# EAGLE board front_board (EAGLE 7.1.0)
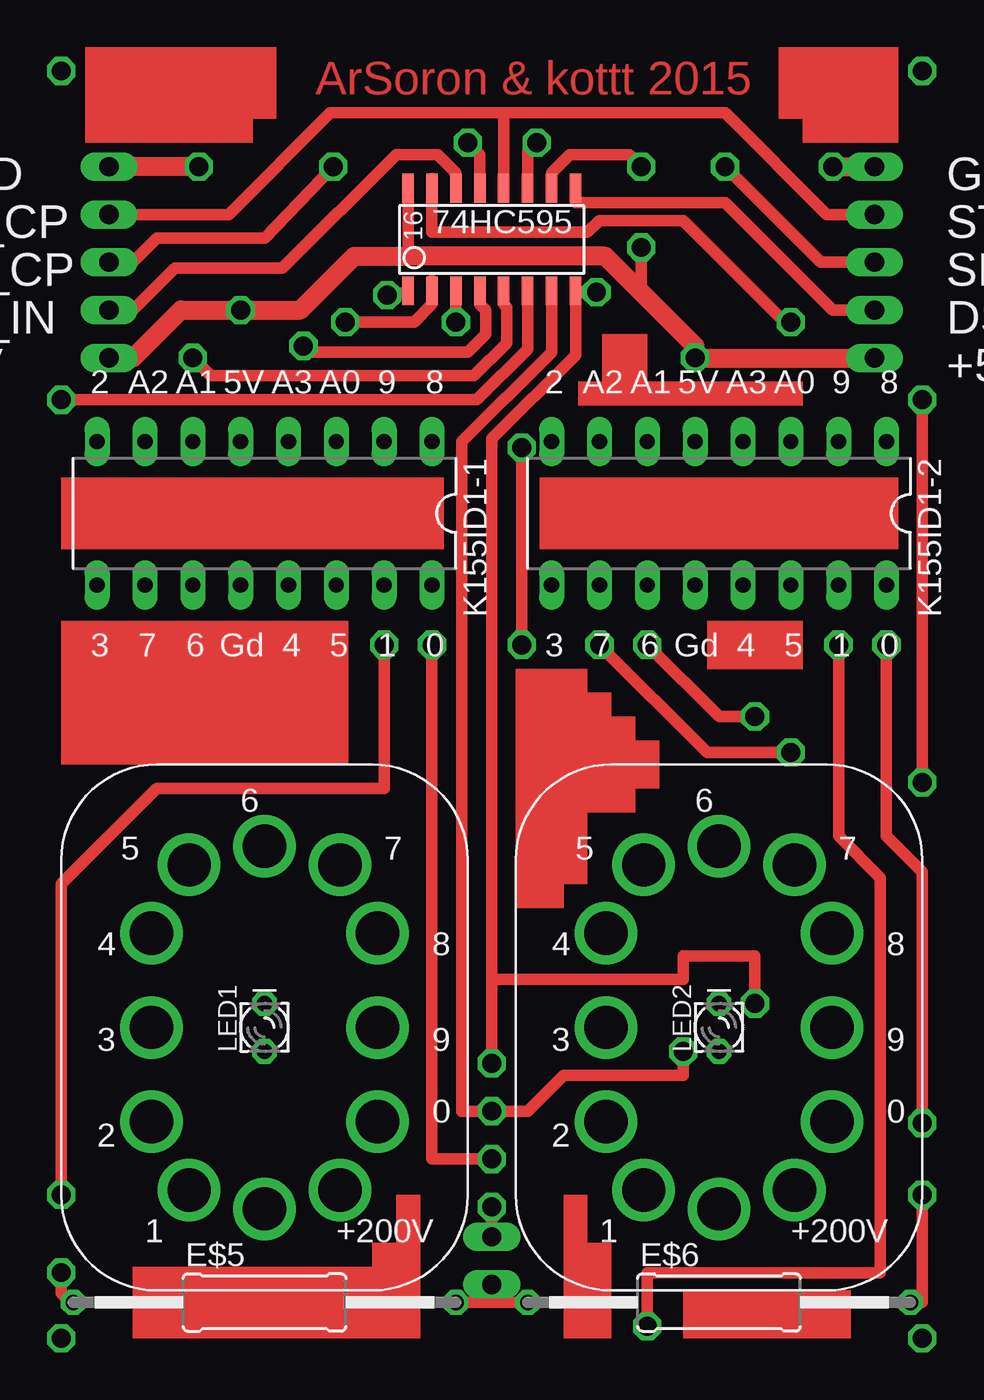
[diagram p0: board, top side]
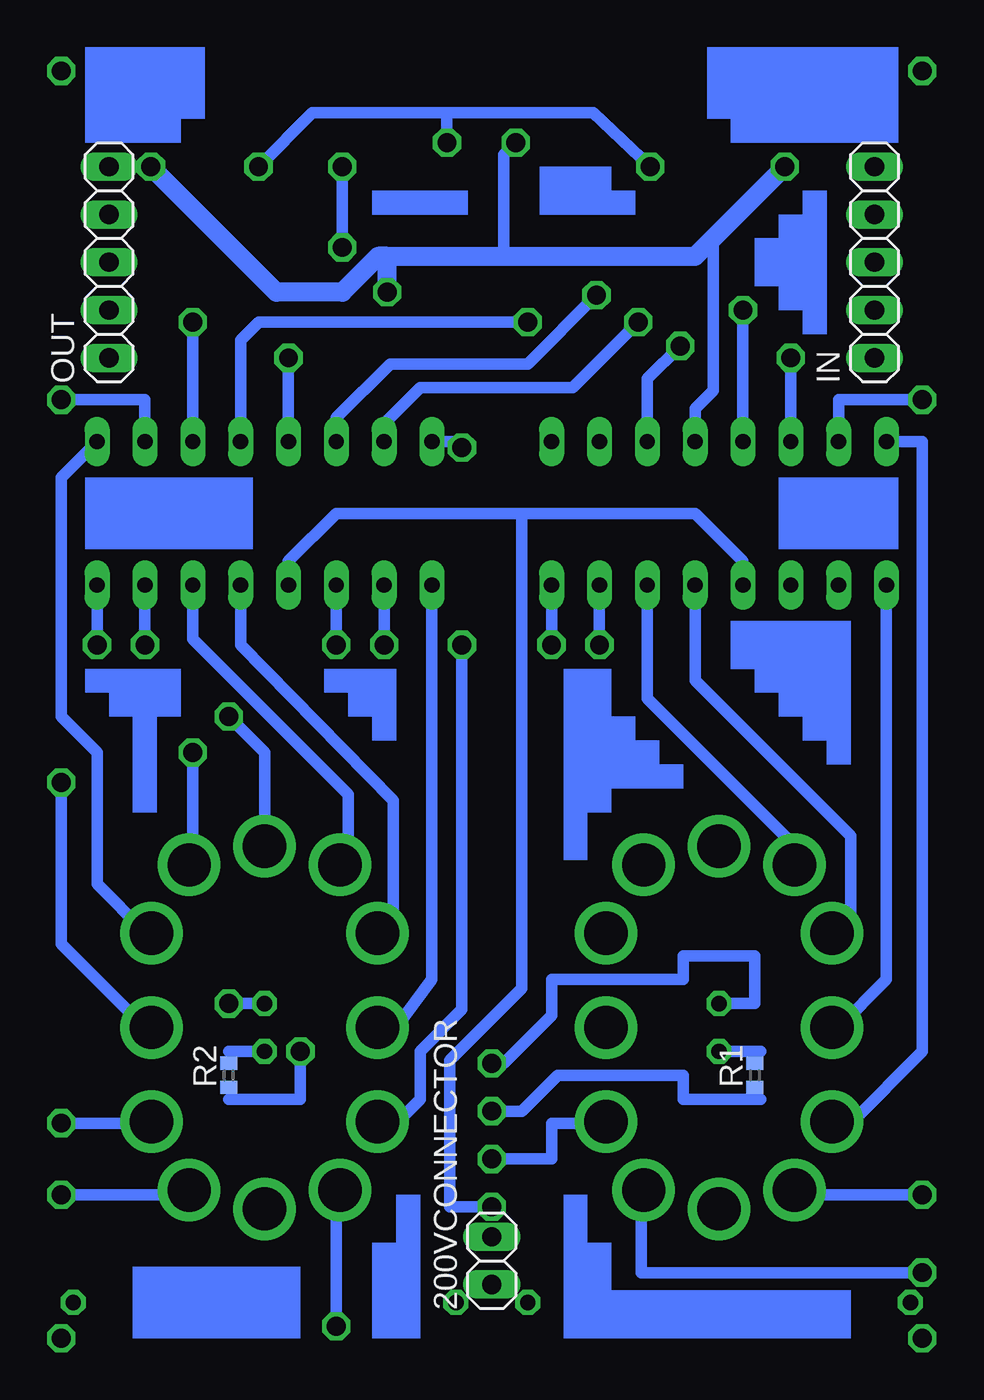
[diagram p1: board, bottom side, seen from below]

No outline drawn. Coordinates in mm, seen from the top.
Copper layers (1*16): Top 0.035mm / dielectric 1.5mm / Bottom 0.035mm
Design rules "default": minimum track width 10mil, minimum drill 24mil, track to track 8mil, track to pad 8mil, pad to pad 8mil, via to via 8mil, smd to smd 8mil, copper to edge 40mil, drill to drill 8mil, minimum pad ring 10mil, minimum via ring 8mil, stop-mask expansion 4mil, vias tented up to drill 0mil, thermal gap 10mil

## Footprints (pad centres in the part's own frame; a part is rotated, then mirrored left to right if it is on the bottom)
SO-16 = smd 0.61 x 1.524: 1 -4.445,-2.794; 2 -3.175,-2.794; 3 -1.905,-2.794; 4 -0.635,-2.794; 5 0.635,-2.794; 6 1.905,-2.794; 7 3.175,-2.794; 8 4.445,-2.794; 9 4.445,2.667; 10 3.175,2.667; 11 1.905,2.667; 12 0.635,2.667; 13 -0.635,2.667; 14 -1.905,2.667; 15 -3.175,2.667; 16 -4.445,2.667
1X02 = drill 1.016 long: 1 -1.27,0; 2 1.27,0
IN-12 = drill 2.3: 0 6,-5; 1 -4,-8.635; 2 -6,-5; 3 -6,0; 4 -6,5; 5 -4,8.635; 6 0,9.635; 7 4,8.635; 8 6,5; 9 6,0; +200V 4,-8.635; P$10 0,-9.635
0309/20 = drill 0.813 octagon: 1 -10.16,0; 2 10.16,0
1X05 = drill 1.016 long: 1 -5.08,0; 2 -2.54,0; 3 0,0; 4 2.54,0; 5 5.08,0
K155ID1 = drill 0.813 long: 1 -8.89,-3.81; 2 -6.35,-3.81; 3 -3.81,-3.81; 4 -1.27,-3.81; 5 1.27,-3.81; 6 3.81,-3.81; 7 6.35,-3.81; 8 8.89,-3.81; 9 8.89,3.81; 10 6.35,3.81; 11 3.81,3.81; 12 1.27,3.81; 13 -1.27,3.81; 14 -3.81,3.81; 15 -6.35,3.81; 16 -8.89,3.81
LED_LD260 = drill 0.813 octagon: A -1.27,0; K 1.27,0
R0402 = smd 0.7 x 0.9: 1 -0.65,0; 2 0.65,0

## Placement (x,y rotation side)
74HC595  [SO-16]  0,29.21 0 top
200VCONNECTOR  [1X02]  0,-25.08 90 bottom
E$1  [IN-12]  -12.06,-12.7 0 top
E$2  [IN-12]  12.06,-12.7 0 top
E$5  [0309/20]  -12.06,-27.3 0 top
E$6  [0309/20]  12.06,-27.3 0 top
IN  [1X05]  -20.32,27.94 90 bottom
K155ID1-1  [K155ID1]  -12.06,14.61 180 top
K155ID1-2  [K155ID1]  12.06,14.61 180 top
LED1  [LED_LD260]  -12.06,-12.7 90 top
LED2  [LED_LD260]  12.06,-12.7 90 top
OUT  [1X05]  20.32,27.94 90 bottom
R1  [R0402]  -13.97,-15.24 90 bottom
R2  [R0402]  13.97,-15.24 90 bottom

## Library data of the parts
74HC595 = texas
200VCONNECTOR IN OUT = pinhead
E$1 E$2 K155ID1-1 K155ID1-2 = _ArSoron
E$5 E$6 = rcl
LED1 LED2 R1 R2 = eagle-ltspice

## Nets
+5V: IN.1 K155ID1-1.5 K155ID1-2.5 OUT.1
+200V: 200VCONNECTOR.1
+200V_LEFT: E$5.1
+200V_RIGHT: E$6.2
DATA_IN: IN.2
DATA_OUT: OUT.2
GND_HIGH: K155ID1-1.12 K155ID1-2.12
GND_LOW: IN.5 K155ID1-1.4 LED1.K LED2.K
S$1: K155ID1-2.1
S$2: K155ID1-2.2
S$3: K155ID1-2.16
S$4: K155ID1-2.9
S$5: K155ID1-2.8
S$6: K155ID1-2.13
S$7: K155ID1-2.14
S$8: K155ID1-2.10
S$9: K155ID1-1.7
S$10: K155ID1-2.11
S$11: LED2.A
S$12: K155ID1-2.15
S$14: K155ID1-1.16
S$15: K155ID1-1.9
S$16: K155ID1-1.8
S$17: K155ID1-1.13
S$18: K155ID1-1.14
S$19: LED1.A
S$20: K155ID1-1.6
S$21: K155ID1-1.3
S$22: K155ID1-1.15
S$23: K155ID1-2.3
S$24: K155ID1-2.4
S$25: K155ID1-2.7
S$26: K155ID1-2.6
SH_CP: IN.3 OUT.3
ST_CP: IN.4 OUT.4

## Tracks (layer width: path | path; a pad name or v marks a point on that pad's centre or on a via)
+5V  (via drill 1)
  Top 0.61: -4.45,28.26 -4.45,32.07 | 3.17,31.43 3.17,32.7 4.13,33.66 7.3,33.66 v7.94,33.02 | v7.94,28.73 7.94,26.35
  Top 1.016: IN.1 -19.05,22.86 -16.51,25.4 v-13.34,25.4 -10.16,25.4 -7.3,28.26 -4.45,28.26 6.03,28.26 7.94,26.35 10.79,23.5 v10.79,22.86 OUT.1
  Bottom 0.61: K155ID1-1.5 v-13.34,25.4 | K155ID1-2.5 v10.79,22.86 | v7.94,33.02 v7.94,28.73
+200V
  Top 0.61: 1.91,-27.3 0,-27.3 | 0,-27.3 -1.91,-27.3 | 0,-27.3 200VCONNECTOR.1
+200V_LEFT  (via drill 1)
  Top 0.61: v-22.86,-25.72 -22.86,-26.67 -22.86,-26.83 -22.38,-27.3 E$5.1
  Bottom 0.61: -7.94,-21.27 -7.94,-25.72 v-22.86,-25.72
+200V_RIGHT  (via drill 1)
  Top 0.61: v22.86,-21.59 22.86,-27.3 E$6.2
  Bottom 0.61: 15.88,-21.59 v22.86,-21.59
DATA_IN
  Top 0.61: -1.91,31.75 -1.91,32.7 -2.86,33.66 -5.08,33.66 -11.11,27.62 -16.83,27.62 -19.05,25.4 IN.2
DATA_OUT
  Top 0.61: 4.45,31.11 12.38,31.11 18.1,25.4 OUT.2
GND_HIGH  (via drill 1)
  Top 0.61: v0,-22.23 0,-23.5
  Bottom 0.61: K155ID1-2.12 10.79,12.06 8.26,14.61 -1.59,14.61 | -1.59,14.61 -1.59,-10.64 2.22,-14.45 2.22,-22.23 v0,-22.23 | K155ID1-1.12 -13.34,12.06 -10.79,14.61 -1.59,14.61
GND_LOW  (via drill 1)
  Top 0.61: v5.56,26.35 4.45,26.35 4.45,23.02 0,18.57 0,-10.16 | v-1.27,34.29 -0.64,33.66 -0.64,31.43 | v13.97,-11.43 13.97,-8.89 10.16,-8.89 10.16,-10.16 0,-10.16 | v0,-14.61 0,-10.16
  Top 1.016: v18.1,33.02 20.32,33.02 | v-15.56,33.02 IN.5
  Bottom 0.61: -0.64,28.26 -0.64,33.66 v-1.27,34.29 | LED2.K v13.97,-11.43 | v0,-14.61 -0.64,-14.61 -3.17,-12.06 -3.17,-10.16 -10.16,-10.16 -10.16,-8.89 -13.97,-8.89 -13.97,-11.43 LED1.K | K155ID1-1.4 -10.79,20.16 -11.75,21.11 -11.75,29.21
  Bottom 1.016: v18.1,33.02 11.43,26.35 7.94,26.35 6.03,28.26 5.56,28.26 | v5.56,26.35 5.56,28.26 | 5.56,28.26 -0.64,28.26 -10.79,28.26 -11.75,29.21 v-15.56,33.02
LED+  (via drill 1)
  Top 0.61: v10.16,-13.97 10.16,-15.24 3.81,-15.24 1.91,-17.14 v0,-17.14 -1.59,-17.14 -1.59,18.41 3.17,23.18 3.17,26.04
  Bottom 0.61: -14.29,-16.51 -10.16,-16.51 -10.16,-15.24 -3.49,-15.24 -1.59,-17.14 v0,-17.14 | v10.16,-13.97 10.16,-16.51 13.97,-16.51
S$1
  Bottom 0.61: 18.41,-7.62 20.95,-5.08 20.95,1.91 22.86,3.81 22.86,16.51 K155ID1-2.1
S$2  (via drill 1)
  Top 0.61: v22.86,0.32 v22.86,20.64
  Bottom 0.61: 18.41,-12.7 22.86,-8.26 v22.86,0.32 | v22.86,20.64 18.41,20.64 K155ID1-2.2
S$3  (via drill 1)
  Top 0.61: v22.86,-17.78 22.86,-4.45 20.95,-2.54 v20.95,7.62
  Bottom 0.61: 18.41,-17.78 v22.86,-17.78 | v20.95,7.62 K155ID1-2.16
S$4
  Bottom 0.61: 5.71,-12.7 5.08,-12.7 3.17,-10.16 K155ID1-2.9
S$5  (via drill 1)
  Top 0.61: v1.59,7.62 v1.59,18.1
  Bottom 0.61: 5.71,-17.78 5.08,-17.78 3.81,-16.51 3.81,-13.97 1.59,-11.75 v1.59,7.62 | v1.59,18.1 1.91,18.41 K155ID1-2.8
S$6
  Bottom 0.61: 5.71,-7.62 5.24,-7.14 5.24,-0.64 13.34,7.62 K155ID1-2.13
S$7
  Bottom 0.61: 8.26,-3.81 7.62,-3.17 7.62,-0.32 15.88,7.94 K155ID1-2.14
S$8  (via drill 1)
  Top 0.61: v15.88,1.91 11.43,1.91 v5.71,7.62
  Bottom 0.61: 15.88,-4.13 v15.88,1.91 | v5.71,7.62 K155ID1-2.10
S$9  (via drill 1)
  Top 0.61: v-22.86,20.64 -0.79,20.64 1.91,23.34 1.91,26.67
  Bottom 0.61: K155ID1-1.7 -18.41,20.64 v-22.86,20.64
S$10  (via drill 1)
  Top 0.61: v13.97,3.81 12.06,3.81 v8.26,7.62
  Bottom 0.61: 12.06,-2.54 12.06,1.91 v13.97,3.81 | v8.26,7.62 K155ID1-2.11
S$11
  Bottom 0.61: LED2.A 13.97,-13.97
S$12  (via drill 1)
  Top 0.61: v8.26,-28.57 8.26,-25.72 20.64,-25.72 20.64,-4.76 18.41,-2.54 v18.41,7.62
  Bottom 0.61: v18.41,7.62 K155ID1-2.15 | 8.26,-21.59 v8.26,-28.57
S$13  (via drill 1)
  other vias: -22.86,38.1
S$14  (via drill 1)
  Top 0.61: v0,-19.68 -3.17,-19.68 v-3.17,7.62
  Bottom 0.61: -5.71,-17.78 -3.17,-17.78 -3.17,-19.68 v0,-19.68 | v-3.17,7.62 K155ID1-1.16
S$15
  Bottom 0.61: -18.41,-12.7 -20.95,-10.16 K155ID1-1.9
S$16
  Bottom 0.61: -18.41,-17.78 -19.05,-17.78 -22.86,-13.97 -22.86,18.41 K155ID1-1.8
S$17
  Bottom 0.61: -18.41,-7.62 -19.05,-6.99 -19.05,-2.54 -10.79,5.71 K155ID1-1.13
S$18
  Bottom 0.61: -15.88,-3.81 -15.88,-2.86 -8.26,4.76 K155ID1-1.14
S$19
  Bottom 0.61: LED1.A -14.29,-13.97
S$20  (via drill 1)
  Top 0.61: v-15.88,22.86 -14.92,21.91 -0.95,21.91 0.79,23.65 0.79,25.56 0.64,25.72 0.64,26.67
  Bottom 0.61: K155ID1-1.6 v-15.88,22.86
S$21  (via drill 1)
  Top 0.61: v-10,23.5 -9.68,23.18 -1.27,23.18 -0.32,24.13 -0.32,25.4 -0.64,25.72 -0.64,26.67
  Bottom 0.61: K155ID1-1.3 -8.26,21.75 v-10,23.5
S$22  (via drill 1)
  Top 0.61: v-22.86,-21.59 -22.86,-5.08 -17.78,0 -5.71,0 v-5.71,7.62
  Bottom 0.61: v-5.71,7.62 K155ID1-1.15 | -16.51,-21.59 v-22.86,-21.59
S$23  (via drill 1)
  Top 0.61: v15.88,24.77 15.56,24.77 10.16,30.16 5.71,30.16 5.08,29.53 -3.17,29.53 -3.17,32.38
  Bottom 0.61: K155ID1-2.3 v15.88,24.77
S$24  (via drill 1)
  Top 0.61: v-1.91,24.77 -1.91,26.35
  Bottom 0.61: K155ID1-2.4 13.34,23.81 12.38,24.77 v-1.91,24.77
S$25  (via drill 1)
  Top 0.61: v-7.78,24.77 -4.13,24.77 -3.17,25.72 -3.17,26.99
  Bottom 0.61: K155ID1-2.7 5.71,19.37 3.81,21.27 -4.29,21.27 v-7.78,24.77
S$26  (via drill 1)
  Top 0.61: v-5.56,26.19 -4.45,26.35
  Bottom 0.61: K155ID1-2.6 8.26,19.68 5.4,22.54 -1.91,22.54 v-5.56,26.19
S$27  (via drill 1)
  other vias: 22.86,38.1
S$28  (via drill 1)
  other vias: 22.86,-29.21
S$29  (via drill 1)
  other vias: -22.86,-29.21
SH_CP  (via drill 1)
  Top 0.61: 1.91,31.43 1.91,33.81 v2.38,34.29 | v12.38,33.02 17.46,27.94 OUT.3 | v-8.41,33.02 -12.06,29.21 -17.78,29.21 -19.05,27.94 IN.3
  Bottom 0.61: v2.38,34.29 2.38,35.88 | 2.38,35.88 9.53,35.88 v12.38,33.02 | 2.38,35.88 -5.4,35.88 v-8.41,33.02
ST_CP
  Top 0.61: 0.64,31.43 0.64,35.88 | 0.64,35.88 12.38,35.88 17.78,30.48 OUT.4 | 0.64,35.88 -8.57,35.88 -13.97,30.48 IN.4
(copper drawn outside any net)
  shapes: Bottom area x36, Top area x21

## Text on the board
Top: ArSoron & kottt 2015
tNames: GND | GND | ST_CP | ST_CP | SH_CP | SH_CP | DS_IN | DS_OUT | +5V | +5V